# Altium PCB Glucometer-I.C.- RF Module V3.PcbDoc
Units mm, origin at the board's own origin, x right, y up, seen from the top; angles counter-clockwise.
Board outline 152.4 x 101.6 mm, 2 copper layers (Top Layer, Bottom Layer); 2 components, 9 nets, 22 pads, 0 vias.
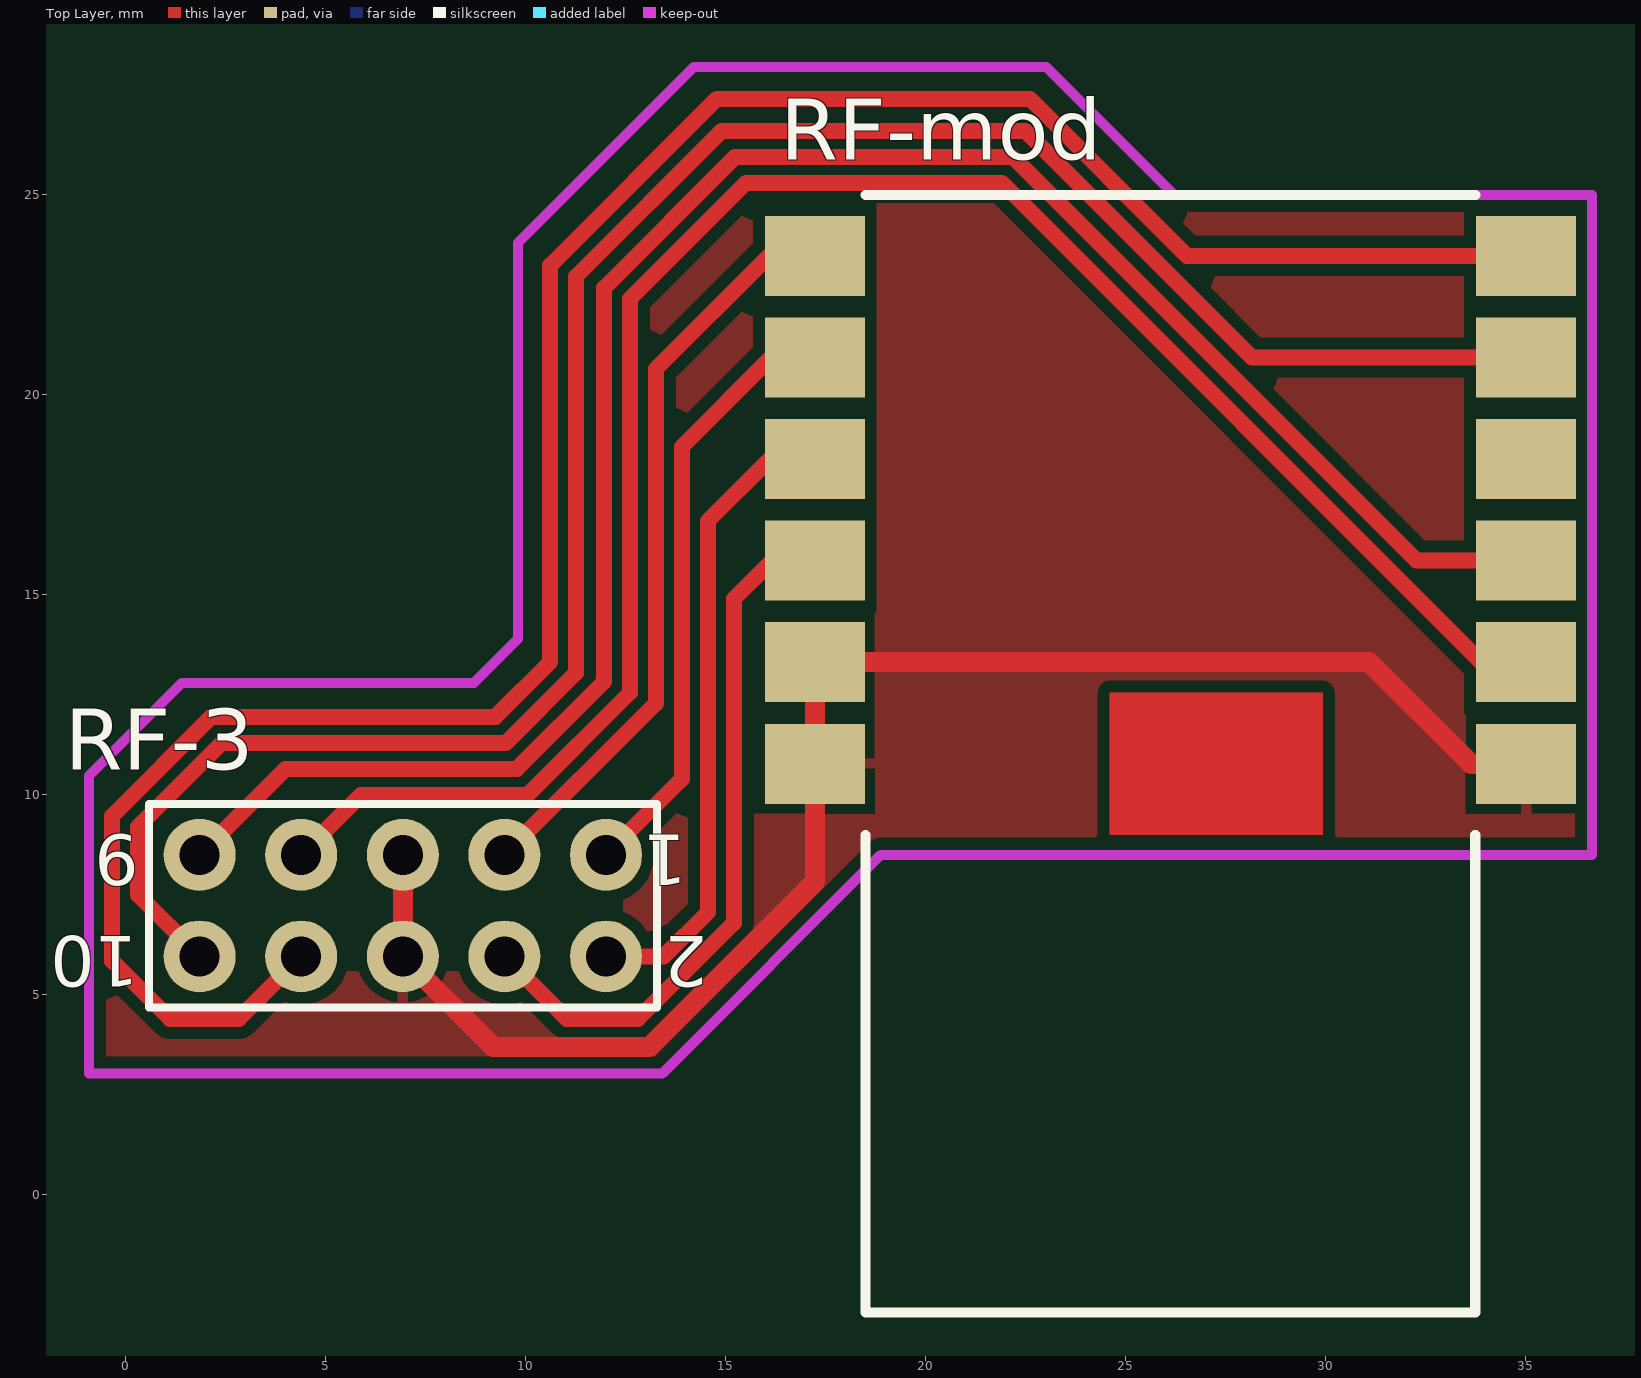
[diagram p0: Top Layer view]
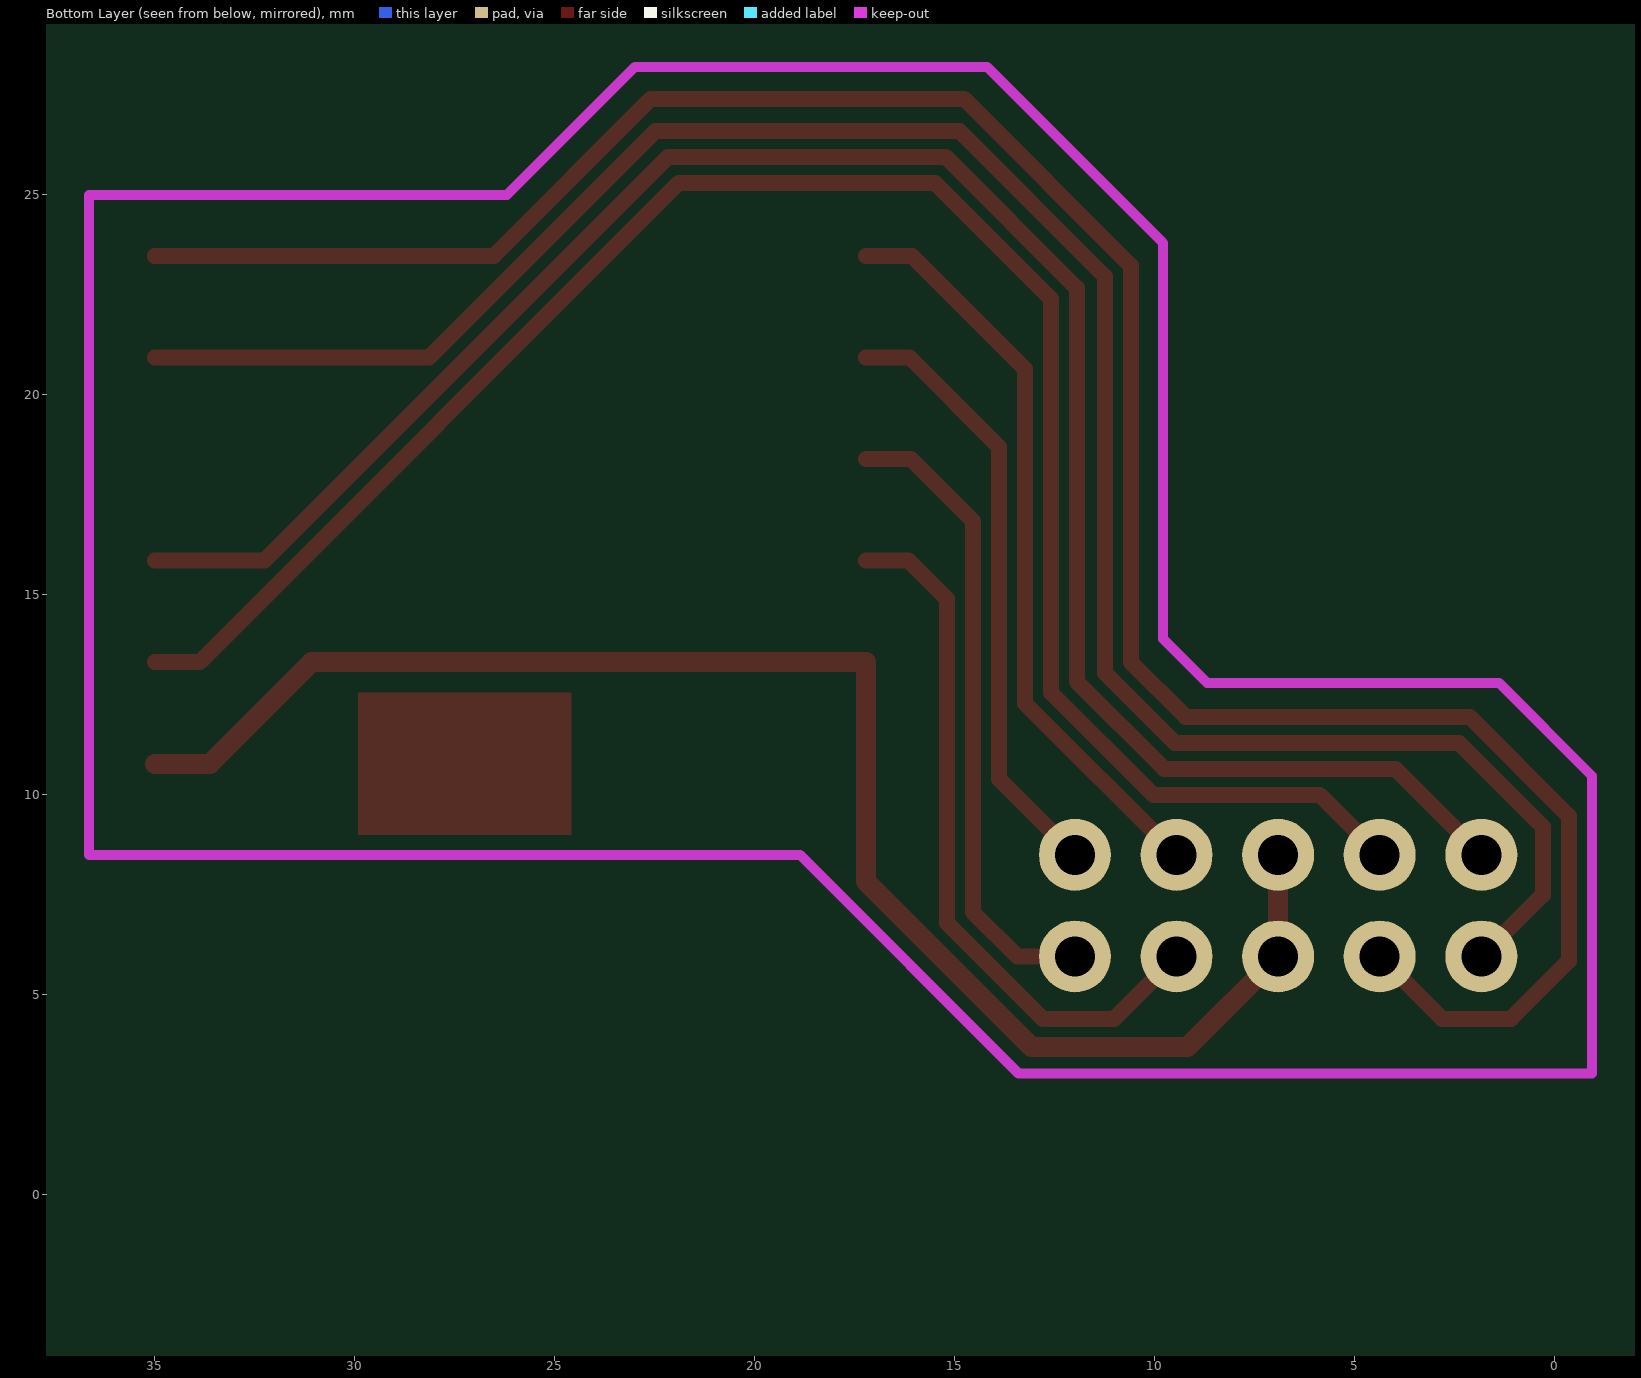
[diagram p1: Bottom Layer view, seen from below]

## Layer stack, top to bottom
Top Layer: signal copper 0.0356
Dielectric: dielectric 0.32, FR-4, Dk 4.8
Bottom Layer: signal copper 0.0356

## Board outline
-59.128,-38.6 93.272,-38.6 93.272,63 -59.128,63

## Design rules (kind name [scope] priority, off if disabled: settings)
Clearance [All] p1: gap=0.25
PolygonConnect [All] p1: connectstyle=Relief reliefconductorwidth=0.254 reliefentries=4 polygonreliefangle="90 Angle" airgapwidth=0.254
RoutingVias [All] p1: holewidth=0.711 width=1.27 viastyle="Through Hole" minholewidth=0.711 minwidth=1.27 maxholewidth=0.711 maxwidth=1.27
SolderMaskExpansion [All] p1: expansion=0.102
Width [All] p1: maxlimit=5 minlimit=0.25 preferedwidth=0.4 minimp=50.000000 maximp=50.000000 favimp=50.000000
28 further rules are at their usual default settings.

## Classes and differential pairs
component class "Glucometer-I.C.- RF Module V3": RF-3

## Components (designator, comment, footprint, x,y, rotation, side; value= is the part's Value field where it differs from the comment)
RF-3 "Header 5X2" HDR2X5 12,8.5 r180 top
RF-mod "MRF89XAM8A" MRF89XAM8A 35,25 r180 top

## Footprints (in the part's own frame and the unit in brackets; to place one, negate y for a bottom-side part, rotate by r counter-clockwise, add the part's x,y. Pads: shape width x height; smd on the part's side, far side on the other; paste and mask are expansions set on the pad)
HDR2X5 [mm] "Connector; Header; 5x2 Position"
  round 1.8 hole 1: 1(0,0) 2(0,2.54) 3(2.54,0) 4(2.54,2.54) 5(5.08,0) 6(5.08,2.54) 7(7.62,0) 8(7.62,2.54) 9(10.16,0) 10(10.16,2.54)
  silkscreen extent -1.27,-1.27 11.43,3.81
MRF89XAM8A [mm] "RF Module"
  rect 2.5x2 smd: 1(0,14.224) 2(0,11.684) 3(0,9.144) 4(0,6.604) 5(0,4.064) 6(0,1.524) 7(17.78,1.524) 8(17.78,4.064) 9(17.78,6.604) 10(17.78,9.144) 11(17.78,11.684) 12(17.78,14.224)
  Top Layer region: 5.08,12.446 10.414,12.446 10.414,16.002 5.08,16.002
  silkscreen extent 1.27,0 16.51,27.94, body extent 0,0 17.78,27.94, height 1.91

## Part data
RF-3: "Header, 5-Pin, Dual row"
RF-mod: "RF Module. 868MHz Ultra Low Power Sub-Ghz Transceiver Module"

## Nets (pads, with @x,y where several pads share a name; then routed paths per layer and width w, separated by ;. In a path a pad name is that pad's centre, name@x,y a point inside that pad or via, vN(x,y) a via of type N, cw(c..) or ccw(c..) an arc to the next point about the centre after c; other vN are vias at no path point)
3.3V: RF-3.4 RF-mod.10 | length 17.9
  Top Layer w0.4: RF-3.4 11.02,4.4 12.8,4.4 15.2,6.8 15.2,14.9 16.156,15.856 RF-mod.10
CSCON: RF-3.9 RF-mod.3 | length 50.3
  Top Layer w0.4: RF-3.9 3.99,10.65 9.772,10.65 11.95,12.828 11.95,22.669 15.231,25.95 22.169,25.95 32.263,15.856 RF-mod.3
CSDATA: RF-3.1 RF-mod.8 | length 15.2
  Top Layer w0.4: RF-3.1 13.9,10.4 13.9,18.7 16.136,20.936 RF-mod.8
GND: RF-3.5 RF-3.6 RF-mod.1 RF-mod.11 RF-mod.12 | length 39.8
  Top Layer w0.5: RF-3.5 RF-3.6 9.18,3.7 13.09,3.7 17.22,7.83 RF-mod.12 RF-mod.11 31.084,13.316 33.624,10.776 RF-mod.1
IRQ1: RF-3.2 RF-mod.9 | length 16.1
  Top Layer w0.4: RF-3.2 13.441,5.96 14.55,7.069 14.55,16.85 16.096,18.396 RF-mod.9
RESET: RF-3.7 RF-mod.2 | length 48.3
  Top Layer w0.4: RF-3.7 5.88,10 10.041,10 12.6,12.559 12.6,22.4 15.5,25.3 21.9,25.3 33.884,13.316 RF-mod.2
SCK: RF-3.8 RF-mod.6 | length 59.8
  Top Layer w0.4: RF-3.8 2.82,4.4 1.1,4.4 -0.35,5.85 -0.35,9.469 2.131,11.95 9.233,11.95 10.6,13.317 10.6,23.228 14.772,27.4 22.6,27.4 26.524,23.476 RF-mod.6
SDI: RF-3.10 RF-mod.5 | length 53.9
  Top Layer w0.4: RF-3.10 0.3,7.5 0.3,9.2 2.4,11.3 9.502,11.3 11.25,13.048 11.25,22.959 14.891,26.6 22.481,26.6 28.145,20.936 RF-mod.5
SDO: RF-3.3 RF-mod.7 | length 18.9
  Top Layer w0.4: RF-3.3 13.25,12.29 13.25,20.65 16.076,23.476 RF-mod.7
pads on no net: RF-mod.4

## Polygon pours and split planes (outlines as drawn)
GND on Top Layer "Bottom Layer-No Net" (solid, pour order 7): -0.928,3.031 13.403,3.031 18.872,8.5 36.652,8.5 36.652,25 26.2,25 23,28.2 14.2,28.2 9.8,23.8 9.8,13.9 8.7,12.8 1.4,12.8 -0.928,10.472

## Keep-outs
Keep-Out Layer:
  lines w0.254: -0.928,3.031 -0.928,10.472 1.4,12.8 8.7,12.8 9.8,13.9 9.8,21.2 9.8,23.8 14.2,28.2 23,28.2 24.413,26.787 26.2,25 36.652,25 36.652,8.5 18.872,8.5 13.403,3.031 -0.928,3.031

## Text inside footprints (layer, text, board x,y; h text height)
RF-3: Top Overlay "10" at 0.316,6.468 h1.27 r180; Top Overlay "9" at 0.316,9.008 h1.27 r180; Top Overlay "1" at 14.032,9.008 h1.27 r180; Top Overlay "2" at 14.54,6.468 h1.27 r180